# Altium PCB standos.PcbDoc (part 1 of 2)
Units mil, origin at the board's own origin, x right, y up, seen from the top; angles counter-clockwise.
Board outline 11023.62 x 8464.57 mil, 2 copper layers (Top Layer, Bottom Layer); 116 components, 136 nets, 701 pads, 0 vias.
Unrouted connection lines stored in the file: 409.
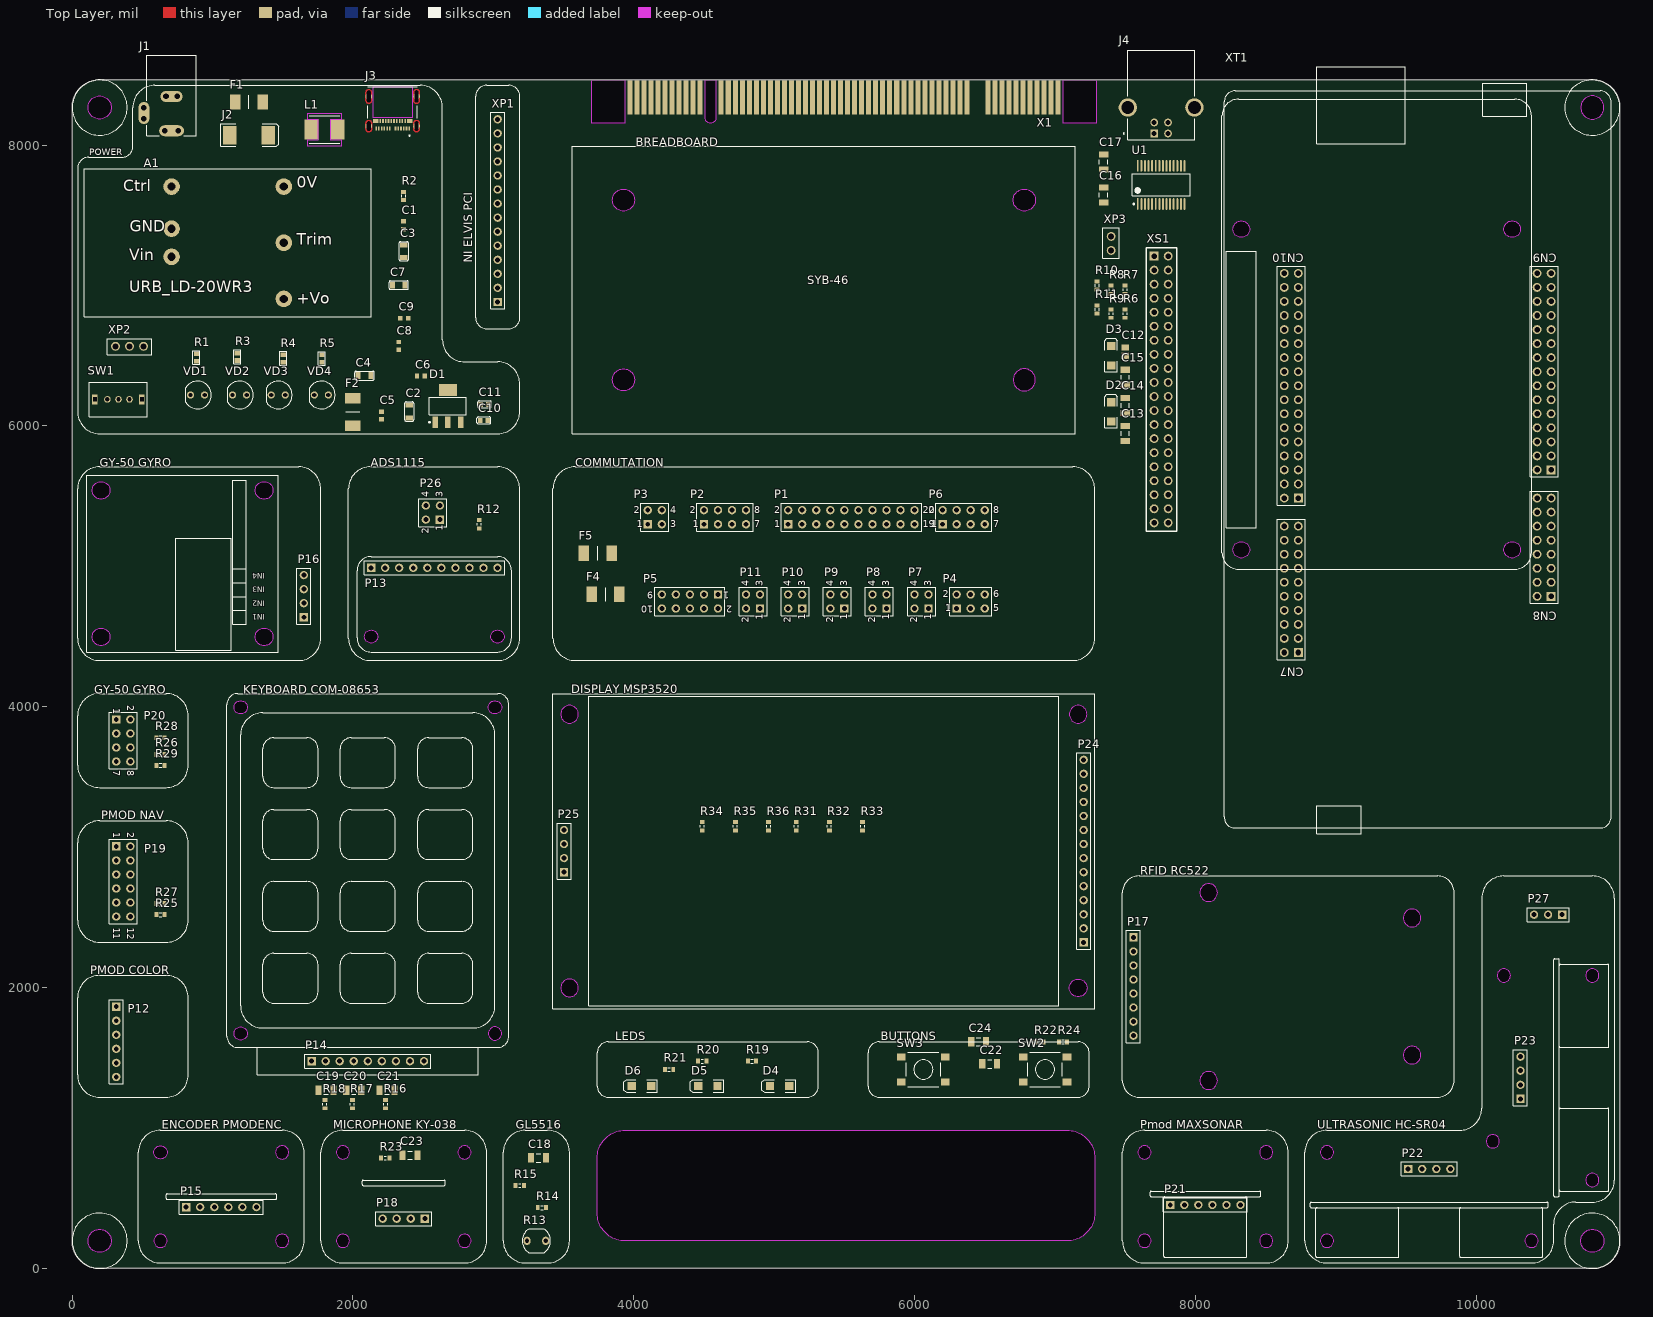
[diagram p0: Top Layer view]
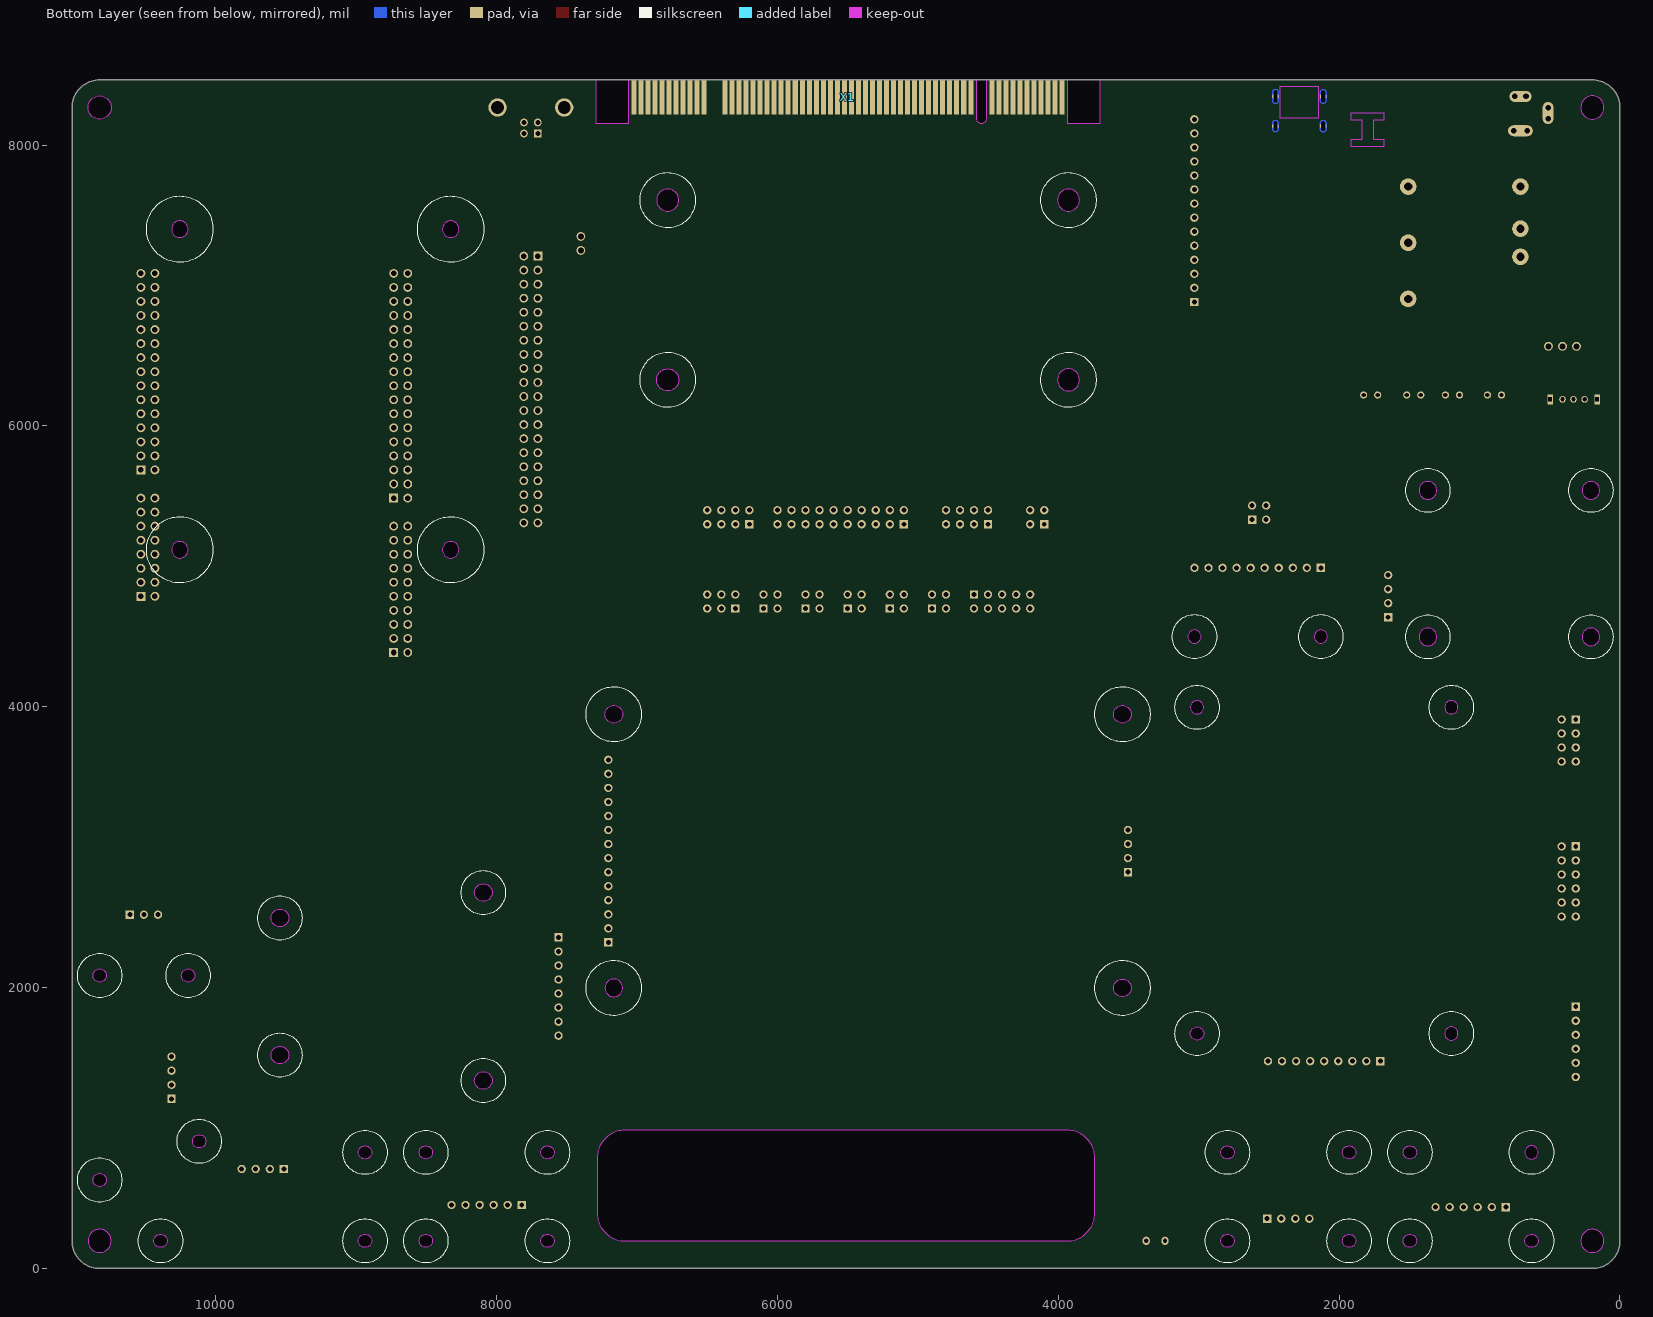
[diagram p1: Bottom Layer view, seen from below]

## Layer stack, top to bottom
Top Solder: solder mask 0.4, Solder Resist, Dk 3.5
Top Layer: signal copper 1.4
Dielectric 1: dielectric 12.6, FR-4, Dk 4.8
Bottom Layer: signal copper 1.4
Bottom Solder: solder mask 0.4, Solder Resist, Dk 3.5

## Board outline
0,196.85 0,8267.72 cw(c196.85,8267.72) 196.85,8464.57 10826.77,8464.57 cw(c10826.77,8267.72) 11023.62,8267.72 11023.62,196.85 cw(c10826.77,196.85) 10826.77,0 196.85,0 cw(c196.85,196.85)
cut-out: 9480.32,1519.69 ccw(c9543.31,1519.69) 9543.31,1456.69 ccw(c9543.31,1519.69) 9606.3,1519.69 ccw(c9543.31,1519.69) 9543.31,1582.68 ccw(c9543.31,1519.69)
cut-out: 9480.32,2496.06 ccw(c9543.31,2496.06) 9543.31,2433.07 ccw(c9543.31,2496.06) 9606.3,2496.06 ccw(c9543.31,2496.06) 9543.31,2559.06 ccw(c9543.31,2496.06)
cut-out: 8031.5,2677.17 ccw(c8094.49,2677.17) 8094.49,2614.17 ccw(c8094.49,2677.17) 8157.48,2677.17 ccw(c8094.49,2677.17) 8094.49,2740.16 ccw(c8094.49,2677.17)
cut-out: 8031.5,1338.58 ccw(c8094.49,1338.58) 8094.49,1275.59 ccw(c8094.49,1338.58) 8157.48,1338.58 ccw(c8094.49,1338.58) 8094.49,1401.57 ccw(c8094.49,1338.58)
cut-out: 6702.76,6328.74 ccw(c6781.5,6328.74) 6781.5,6250 ccw(c6781.5,6328.74) 6860.24,6328.74 ccw(c6781.5,6328.74) 6781.5,6407.48 ccw(c6781.5,6328.74)
cut-out: 6781.5,7529.53 cw(c6781.5,7608.27) 6702.76,7608.27 cw(c6781.5,7608.27) 6781.5,7687.01 cw(c6781.5,7608.27) 6860.24,7608.27 cw(c6781.5,7608.27)
cut-out: 3927.17,7529.53 cw(c3927.17,7608.27) 3848.43,7608.27 cw(c3927.17,7608.27) 3927.17,7687.01 cw(c3927.17,7608.27) 4005.91,7608.27 cw(c3927.17,7608.27)
cut-out: 3927.17,6250 cw(c3927.17,6328.74) 3848.43,6328.74 cw(c3927.17,6328.74) 3927.17,6407.48 cw(c3927.17,6328.74) 4005.91,6328.74 cw(c3927.17,6328.74)
cut-out: 2130,4452.76 cw(c2130,4500) 2082.76,4500 cw(c2130,4500) 2130,4547.24 cw(c2130,4500) 2177.24,4500 cw(c2130,4500)
cut-out: 3030,4452.76 cw(c3030,4500) 2982.76,4500 cw(c3030,4500) 3030,4547.24 cw(c3030,4500) 3077.24,4500 cw(c3030,4500)
cut-out: 3011.81,3948.82 cw(c3011.81,3996.06) 2964.57,3996.06 cw(c3011.81,3996.06) 3011.81,4043.31 cw(c3011.81,3996.06) 3059.06,3996.06 cw(c3011.81,3996.06)
cut-out: 2964.57,1673.23 ccw(c3011.81,1673.23) 3011.81,1625.98 ccw(c3011.81,1673.23) 3059.06,1673.23 ccw(c3011.81,1673.23) 3011.81,1720.47 ccw(c3011.81,1673.23)
cut-out: 1200.79,1625.98 cw(c1200.79,1673.23) 1153.54,1673.23 cw(c1200.79,1673.23) 1200.79,1720.47 cw(c1200.79,1673.23) 1248.03,1673.23 cw(c1200.79,1673.23)
cut-out: 1200.79,3948.82 cw(c1200.79,3996.06) 1153.54,3996.06 cw(c1200.79,3996.06) 1200.79,4043.31 cw(c1200.79,3996.06) 1248.03,3996.06 cw(c1200.79,3996.06)
cut-out: 206.69,4435.04 cw(c206.69,4498.03) 143.7,4498.03 cw(c206.69,4498.03) 206.69,4561.02 cw(c206.69,4498.03) 269.68,4498.03 cw(c206.69,4498.03)
cut-out: 1368.11,4435.04 cw(c1368.11,4498.03) 1305.12,4498.03 cw(c1368.11,4498.03) 1368.11,4561.02 cw(c1368.11,4498.03) 1431.1,4498.03 cw(c1368.11,4498.03)
cut-out: 1368.11,5478.35 cw(c1368.11,5541.34) 1305.12,5541.34 cw(c1368.11,5541.34) 1368.11,5604.33 cw(c1368.11,5541.34) 1431.1,5541.34 cw(c1368.11,5541.34)
cut-out: 206.69,5478.35 cw(c206.69,5541.34) 143.7,5541.34 cw(c206.69,5541.34) 206.69,5604.33 cw(c206.69,5541.34) 269.68,5541.34 cw(c206.69,5541.34)
cut-out: 2748.03,826.77 ccw(c2795.28,826.77) 2795.28,779.53 ccw(c2795.28,826.77) 2842.52,826.77 ccw(c2795.28,826.77) 2795.28,874.02 ccw(c2795.28,826.77)
cut-out: 1881.89,826.77 ccw(c1929.13,826.77) 1929.13,779.53 ccw(c1929.13,826.77) 1976.38,826.77 ccw(c1929.13,826.77) 1929.13,874.02 ccw(c1929.13,826.77)
cut-out: 1448.82,826.77 ccw(c1496.06,826.77) 1496.06,779.53 ccw(c1496.06,826.77) 1543.31,826.77 ccw(c1496.06,826.77) 1496.06,874.02 ccw(c1496.06,826.77)
cut-out: 629.92,779.53 cw(c629.92,826.77) 582.68,826.77 cw(c629.92,826.77) 629.92,874.02 cw(c629.92,826.77) 677.17,826.77 cw(c629.92,826.77)
cut-out: 3606.3,3946.85 ccw(c3543.31,3946.85) 3543.31,4009.84 ccw(c3543.31,3946.85) 3480.32,3946.85 ccw(c3543.31,3946.85) 3543.31,3883.86 ccw(c3543.31,3946.85)
cut-out: 3606.3,1998.03 ccw(c3543.31,1998.03) 3543.31,2061.02 ccw(c3543.31,1998.03) 3480.32,1998.03 ccw(c3543.31,1998.03) 3543.31,1935.04 ccw(c3543.31,1998.03)
cut-out: 7165.35,2061.02 cw(c7165.35,1998.03) 7228.35,1998.03 cw(c7165.35,1998.03) 7165.35,1935.04 cw(c7165.35,1998.03) 7102.36,1998.03 cw(c7165.35,1998.03)
cut-out: 7228.35,3946.85 ccw(c7165.35,3946.85) 7165.35,4009.84 ccw(c7165.35,3946.85) 7102.36,3946.85 ccw(c7165.35,3946.85) 7165.35,3883.86 ccw(c7165.35,3946.85)
cut-out: 10070.87,905.51 ccw(c10118.11,905.51) 10118.11,858.27 ccw(c10118.11,905.51) 10165.35,905.51 ccw(c10118.11,905.51) 10118.11,952.76 ccw(c10118.11,905.51)
cut-out: 10149.61,2086.61 ccw(c10196.85,2086.61) 10196.85,2039.37 ccw(c10196.85,2086.61) 10244.09,2086.61 ccw(c10196.85,2086.61) 10196.85,2133.86 ccw(c10196.85,2086.61)
cut-out: 8889.76,826.77 ccw(c8937.01,826.77) 8937.01,779.53 ccw(c8937.01,826.77) 8984.25,826.77 ccw(c8937.01,826.77) 8937.01,874.02 ccw(c8937.01,826.77)
cut-out: 8456.69,826.77 ccw(c8503.94,826.77) 8503.94,779.53 ccw(c8503.94,826.77) 8551.18,826.77 ccw(c8503.94,826.77) 8503.94,874.02 ccw(c8503.94,826.77)
cut-out: 7590.55,826.77 ccw(c7637.8,826.77) 7637.8,779.53 ccw(c7637.8,826.77) 7685.04,826.77 ccw(c7637.8,826.77) 7637.8,874.02 ccw(c7637.8,826.77)
cut-out: 2748.03,196.85 ccw(c2795.28,196.85) 2795.28,149.61 ccw(c2795.28,196.85) 2842.52,196.85 ccw(c2795.28,196.85) 2795.28,244.09 ccw(c2795.28,196.85)
cut-out: 1881.89,196.85 ccw(c1929.13,196.85) 1929.13,149.61 ccw(c1929.13,196.85) 1976.38,196.85 ccw(c1929.13,196.85) 1929.13,244.09 ccw(c1929.13,196.85)
cut-out: 1448.82,196.85 ccw(c1496.06,196.85) 1496.06,149.61 ccw(c1496.06,196.85) 1543.31,196.85 ccw(c1496.06,196.85) 1496.06,244.09 ccw(c1496.06,196.85)
cut-out: 582.68,196.85 ccw(c629.92,196.85) 629.92,149.61 ccw(c629.92,196.85) 677.17,196.85 ccw(c629.92,196.85) 629.92,244.09 ccw(c629.92,196.85)
cut-out: 10779.53,2086.61 ccw(c10826.77,2086.61) 10826.77,2039.37 ccw(c10826.77,2086.61) 10874.02,2086.61 ccw(c10826.77,2086.61) 10826.77,2133.86 ccw(c10826.77,2086.61)
cut-out: 10779.53,629.92 ccw(c10826.77,629.92) 10826.77,582.68 ccw(c10826.77,629.92) 10874.02,629.92 ccw(c10826.77,629.92) 10826.77,677.17 ccw(c10826.77,629.92)
cut-out: 10346.46,196.85 ccw(c10393.7,196.85) 10393.7,149.61 ccw(c10393.7,196.85) 10440.94,196.85 ccw(c10393.7,196.85) 10393.7,244.09 ccw(c10393.7,196.85)
cut-out: 8889.76,196.85 ccw(c8937.01,196.85) 8937.01,149.61 ccw(c8937.01,196.85) 8984.25,196.85 ccw(c8937.01,196.85) 8937.01,244.09 ccw(c8937.01,196.85)
cut-out: 8456.69,196.85 ccw(c8503.94,196.85) 8503.94,149.61 ccw(c8503.94,196.85) 8551.18,196.85 ccw(c8503.94,196.85) 8503.94,244.09 ccw(c8503.94,196.85)
cut-out: 7590.55,196.85 ccw(c7637.8,196.85) 7637.8,149.61 ccw(c7637.8,196.85) 7685.04,196.85 ccw(c7637.8,196.85) 7637.8,244.09 ccw(c7637.8,196.85)
cut-out: 10255.91,7342.52 cw(c10255.91,7401.57) 10196.85,7401.57 cw(c10255.91,7401.57) 10255.91,7460.63 cw(c10255.91,7401.57) 10314.96,7401.57 cw(c10255.91,7401.57)
cut-out: 8326.77,7342.52 cw(c8326.77,7401.57) 8267.72,7401.57 cw(c8326.77,7401.57) 8326.77,7460.63 cw(c8326.77,7401.57) 8385.83,7401.57 cw(c8326.77,7401.57)
cut-out: 10255.91,5059.06 cw(c10255.91,5118.11) 10196.85,5118.11 cw(c10255.91,5118.11) 10255.91,5177.17 cw(c10255.91,5118.11) 10314.96,5118.11 cw(c10255.91,5118.11)
cut-out: 8326.77,5059.06 cw(c8326.77,5118.11) 8267.72,5118.11 cw(c8326.77,5118.11) 8326.77,5177.17 cw(c8326.77,5118.11) 8385.83,5118.11 cw(c8326.77,5118.11)
cut-out: 4509.33,8192.73 4509.33,8464.57 4584.54,8464.57 4584.54,8192.33 4584.55,8192.73 cw(c4546.95,8192.73)
cut-out: 10744.09,8267.72 ccw(c10826.77,8267.72) 10826.77,8185.04 ccw(c10826.77,8267.72) 10909.45,8267.72 ccw(c10826.77,8267.72) 10826.77,8350.39 ccw(c10826.77,8267.72)
cut-out: 10744.09,196.85 cw(c10826.77,196.85) 10826.77,279.53 cw(c10826.77,196.85) 10909.45,196.85 cw(c10826.77,196.85) 10826.77,114.17 cw(c10826.77,196.85)
cut-out: 196.85,8185.04 cw(c196.85,8267.72) 114.17,8267.72 cw(c196.85,8267.72) 196.85,8350.39 cw(c196.85,8267.72) 279.53,8267.72 cw(c196.85,8267.72)
cut-out: 196.85,114.17 cw(c196.85,196.85) 114.17,196.85 cw(c196.85,196.85) 196.85,279.53 cw(c196.85,196.85) 279.53,196.85 cw(c196.85,196.85)
cut-out: 3740.16,393.7 3740.16,787.4 cw(c3937.01,787.4) 3937.01,984.25 7086.61,984.25 cw(c7086.61,787.4) 7283.46,787.4 7283.46,393.7 cw(c7086.61,393.7) 7086.61,196.85 3937.01,196.85 cw(c3937.01,393.7)
cut-out: 7059.33,8154.72 7059.33,8464.57 7295.57,8464.57 7295.57,8154.72
cut-out: 3700.91,8154.72 3700.91,8464.57 3937.11,8464.57 3937.11,8154.72

## Design rules (kind name [scope] priority, off if disabled: settings)
Clearance [All] p1: gap=10 ignorepadtopadclearanceinfootprint=FALSE except(0: Arc-Hole Track-Hole SMDPad-Hole THPad-Hole Via-Hole Fill-Hole Poly-Hole Region-Hole Text-Hole)
DiffPairsRouting [All] p1: maxlimit=10 minlimit=10 mostfreqgap=10 toplayer_minwidth=15 toplayer_maxwidth=15 toplayer_prefwidth=15 bottomlayer_minwidth=15 bottomlayer_maxwidth=15 bottomlayer_prefwidth=15 maxuncoupledlength=500
PolygonConnect [All] p1: connectstyle=Relief reliefconductorwidth=10 reliefentries=4 polygonreliefangle="90 Angle" airgapwidth=10
RoutingVias [All] p1: holewidth=28 width=50 viastyle="Through Hole" minholewidth=28 minwidth=50 maxholewidth=28 maxwidth=50
SolderMaskExpansion [All] p1: expansion=4 istentingtop=FALSE
Width [All] p1: maxlimit=39.37 minlimit=7.87 preferedwidth=11.81
29 further rules are at their usual default settings.

## Classes and differential pairs
component class Power: A1 C1 C2 C3 C4 C5 C6 C7 C8 C9 C10 C11 D1 F1 F2 J1 J2 J3 L1 R1 R2 R3 R4 R5 SW1 VD1 VD2 VD3 VD4 X2 XP2
component class Rangefinders: P21 P22 P23 P27
component class "Inertial systems": P19 P20 R25 R26 R27 R28 R29
component class Display: P24 P25 R31 R32 R33 R34 R35 R36
component class "STM32 Nucleo-144": XT1
component class Commutation: P1 P2 P3 P4 P5 P6 P7 P8 P9 P10 P11 R6 R7
component class Peripherals: C18 C19 C20 C21 C22 C23 C24 D4 D5 D6 F4 F5 P12 P13 P14 P15 P16 P17 P18 P26 R12 R13 R14 R15 R16 R17 R18 R19 R20 R21 R22 R23 R24 SW2 SW3
net class ADC_A[2..3]: ADC_A2 ADC_A3
component class USB: C12 C13 C14 C15 C16 C17 D2 D3 J4 R8 R9 R10 R11 U1 XP3
component class "Raspberry Pi4": XS1
component class Elvis_PCI: X1 XP1
differential pair USB_D: +USB_D_P -USB_D_N
differential pair FT_D: +FT_D_P -FT_D_N

## Components (designator, comment, footprint, x,y, rotation, side; value= is the part's Value field where it differs from the comment)
A1 "URB2405LD-20WR3" URB_LD-20WR3 1108.66,7304.72 r0 top
C1 "Cap Semi" 1608[0603] 2362.2,7429.13 r90 top value=1nF
C2 "Cap Pol3" C0805#1 2401.57,6102.36 r270 top value=330uF
C3 "Cap Pol3" C0805#1 2362.2,7244.09 r270 top value=330uF
C4 "Cap Pol3" C0805#1 2082.68,6358.27 r0 top value=470uF
C5 "Cap Semi" 1608[0603] 2204.72,6074.8 r270 top value=1uF
C6 "Cap Semi" 1608[0603] 2484.25,6354.33 r0 top value=1nF
C7 "Cap Pol3" C0805#1 2326.77,7003.31 r180 top value=4.7uF
C8 "Cap Semi" 1608[0603] 2326.77,6570.24 r90 top value=10nF
C9 "Cap Semi" 1608[0603] 2366.14,6767.09 r180 top value=100nF
C10 "C" C0603 2933.07,6039.37 r180 top value="0,1 мк"
C11 "C" C0603 2937.99,6153.54 r180 top value="10 мк"
C12 "Cap Pol3" C0805#2 7500,6529.53 r90 top value=4.7uF
C13 "Cap Semi" C1206 7500,5946.85 r90 top value=10nF
C14 "Cap Semi" C1206 7500,6146.85 r90 top value=100nF
C15 "Cap Semi" C1206 7500,6346.85 r90 top value=100nF
C16 "Cap Semi" C1206 7346.46,7644.1 r90 top value=47pF
C17 "Cap Semi" C1206 7346.46,7880.32 r90 top value=47pF
C18 "Cap Semi" C1206 3320.87,787.4 r0 top value=1uF
C19 "Cap Semi" C1206 1809.45,1270.47 r0 top value=1uF
C20 "Cap Semi" C1206 2006.3,1270.47 r0 top value=1uF
C21 "Cap Semi" C1206 2242.52,1270.47 r0 top value=1uF
C22 "Cap Semi" C1206 6535.43,1456.69 r0 top value=1uF
C23 "Cap Semi" C1206 2407.87,806.3 r180 top value=47nF
C24 "Cap Semi" C1206 6456.69,1614.17 r0 top value=1uF
D1 "LD1117" SOT-223 2677.17,6141.73 r90 top
D2 "LED2" 3.2X1.6X1.1 7400,6100 r90 top
D3 "LED2" 3.2X1.6X1.1 7400,6500 r90 top
D4 "LED2" 3.2X1.6X1.1 5039.37,1299.21 r180 top
D5 "LED2" 3.2X1.6X1.1 4527.56,1299.21 r180 top
D6 "LED2" 3.2X1.6X1.1 4055.12,1299.21 r180 top
F1 "5A" FUSC6127X269N 1259.84,8307.09 r0 top
F2 "3.5A" FUSC6127X269N 2000,6100 r270 top
F4 "5V 1A" FUSC6127X269N 3800,4800 r180 top
F5 "5V 1A" FUSC6127X269N 3744.09,5093.7 r180 top
J1 "PWR2.5" KLD-0202 708.66,8641.73 r270 top
J2 "SK56" SMC 1259.84,8070.87 r0 top
J3 "105450-0101" MOLEX_105450-0101 2283.46,8267.72 r180 top
J4 "USB-B-S-X-X-TH" SAMTEC_USB-B-S-X-X-TH 7755.91,8267.72 r180 top
L1 "ETQP4M4R7YFP" L 1627.52,7923.66 r0 top
P1 "Header 10X2" HDR2X10 5100,5300 r0 top
P2 "Header 4X2" HDR2X4 4500,5300 r0 top
P3 "Header 2X2" HDR2X2 4100,5300 r0 top
P4 "Header 3X2" HDR2X3 6300,4700 r0 top
P5 "Header 5X2" HDR2X5 4600,4800 r180 top
P6 "Header 4X2" HDR2X4 6200,5300 r0 top
P7 "Header 2X2" HDR2X2 6100,4700 r90 top
P8 "Header 2X2" HDR2X2 5800,4700 r90 top
P9 "Header 2X2" HDR2X2 5500,4700 r90 top
P10 "Header 2X2" HDR2X2 5200,4700 r90 top
P11 "Header 2X2" HDR2X2 4900,4700 r90 top
P12 "Header 6" HDR1X6 314.96,1864.17 r270 top locked
P13 "Header 10" HDR1X10 2130,4990 r0 top locked
P14 "Header 9" HDR1X9 1706.3,1476.38 r0 top locked
P15 "Header 6" HDR1X6 812.99,437.01 r0 top
P16 "Header 4" HDR1X4 1650.59,4637.8 r90 top locked
P17 "Header 8" HDR1X8 7559.06,2357.87 r270 top locked
P18 "Header 4" HDR1X4 2512.2,354.33 r180 top locked
P19 "Header 6X2" HDR2X6 314.96,3005.91 r270 top locked
P20 "Header 4X2" HDR2X4 314.96,3909.84 r270 top locked
P21 "Header 6" HDR1X6 7820.87,452.76 r0 top locked
P22 "Header 4" HDR1X4 9515.35,708.66 r0 top locked
P23 "Header 4" HDR1X4 10314.96,1208.27 r90 top locked
P24 "Header 14" HDR1X14 7204.72,2322.44 r90 top locked
P25 "Header 4" HDR1X4 3503.94,2822.44 r90 top locked
P26 "Header 2X2" HDR2X2 2619.68,5333.07 r90 top
P27 "Header 3" HDR1X3 10611.81,2519.68 r180 top
R1 "R" R0603 885.83,6487.2 r90 top value=330
R2 "Res3" J1-0603 2362.2,7637.8 r270 top value=5K1
R3 "R" R0603 1177.17,6492.13 r90 top value=330
R4 "R" R0603 1503.94,6481.3 r270 top value=330
R5 "R" R0603 1779.53,6480.31 r90 top value=330
R6 "Res3" J1-0603 7500,6800 r90 top value=4K7
R7 "Res3" J1-0603 7500,6970.47 r90 top value=4K7
R8 "Res3" J1-0603 7400,6970.47 r90 top value=10
R9 "Res3" J1-0603 7400,6800 r90 top value=10
R10 "Res3" J1-0603 7300,7000 r90 top value=330
R11 "Res3" J1-0603 7300,6829.53 r90 top value=330
R12 "Res3" J1-0603 2900,5300 r90 top value=10K
R13 "GL5516" GL5516 3307.09,196.85 r0 top
R14 "Res3" J1-0603 3346.46,433.07 r0 top value=10K
R15 "Res3" J1-0603 3188.98,590.55 r0 top value=1K
R16 "Res3" J1-0603 2233.07,1170.47 r90 top value=1K
R17 "Res3" J1-0603 1996.85,1170.47 r90 top value=1K
R18 "Res3" J1-0603 1800,1170.47 r90 top value=1K
R19 "Res3" J1-0603 4842.53,1476.38 r0 top value=330
R20 "Res3" J1-0603 4488.2,1476.38 r0 top value=330
R21 "Res3" J1-0603 4251.97,1417.32 r0 top value=330
R22 "Res3" J1-0603 6889.76,1614.17 r0 top value=10K
R23 "Res3" J1-0603 2230.71,786.61 r180 top value=100
R24 "Res3" J1-0603 7057.09,1614.17 r0 top value=10K
R25 "Res3" J1-0603 629.92,2519.68 r0 top value=10K
R26 "Res3" J1-0603 629.92,3661.42 r0 top value=10K
R27 "Res3" J1-0603 629.92,2598.43 r0 top value=10K
R28 "Res3" J1-0603 629.92,3779.53 r180 top value=100K
R29 "Res3" J1-0603 629.92,3582.68 r180 top value=100K
R31 "Res3" J1-0603 5157.48,3149.61 r90 top value=10K
R32 "Res3" J1-0603 5393.7,3149.61 r90 top value=10K
R33 "Res3" J1-0603 5629.92,3149.61 r90 top value=10K
R34 "Res3" J1-0603 4488.19,3149.61 r90 top value=100K
R35 "Res3" J1-0603 4724.41,3149.61 r90 top value=100K
R36 "Res3" J1-0603 4960.63,3149.61 r90 top value=100K
SW1 "KLS7-SS03-12D02-EG-3.0" switch 330.71,6188.98 r180 top
SW2 "430152043826" 430152043826 6929.13,1417.32 r180 top
SW3 "430152043826" 430152043826 6062.99,1417.32 r180 top
U1 "FT232RL-Reel" SSOP-28_N 7755.91,7716.54 r90 top
VD1 "RED" GNL-3012HD 893.7,6220.47 r0 top
VD2 "YELLOW" GNL-3012HD 1192.91,6220.47 r0 top
VD3 "GREEN" GNL-3012HD 1468.5,6220.47 r0 top
VD4 "BLUE" GNL-3012HD 1775.59,6220.47 r0 top
X1 "PCI" PCI 7023.23,8342.13 r0 bottom
XP1 "Header 14" HDR1X14 3031.5,6883.46 r90 top
XP2 "Замыкатель PLS-3" PLS-3 409.45,6566.93 r90 top
XP3 "Замыкатель MJ-O-8KLS" PLS-2 7400,7300 r0 top
XS1 "RPi-J8" RaPi_PLD-40 7755.91,6259.84 r0 top
XT1 "STM32-NUCLEO-144-ZIO" STM32-NUCLEO-144-ZIO 10833.07,4386.61 r180 top

## Footprints (in the part's own frame and the unit in brackets; to place one, negate y for a bottom-side part, rotate by r counter-clockwise, add the part's x,y. Pads: shape width x height; smd on the part's side, far side on the other; paste and mask are expansions set on the pad)
3.2X1.6X1.1 [mm] "SMT LED; 2 Flat Leads"
  rect 1.5x1.5 smd: 1(-1.75,0) 2(1.75,0)
  silkscreen extent -2.9,-1.15 3.2,1.15
1608[0603] [mm] "Chip Capacitor, Body 1.6x0.8mm, IPC High Density"
  rect 0.8x0.9 smd: 1(-0.7,0) 2(0.7,0)
  body extent -0.87,-0.48 0.87,0.48, height 1.3
430152043826 [mm] "6*6mm vertical type, SMD, height 4.3mm, white actuator, 260gf, T&R"
  rect 1.55x1.3 smd: 1(-3.975,2.25) 2(-3.975,-2.25) 3(3.975,2.25) 4(3.975,-2.25)
  silkscreen extent -3.1,-3.1 3.1,3.1, body extent -4.5,-3.1 4.5,3.1, height 4.3
C0603 [mm]
  rect 0.85x0.95 smd: 1(-0.675,0) 2(0.675,0)
  silkscreen extent -1.25,-0.63 1.25,0.63, body extent -0.8,-0.4 0.8,0.4, height 0.9
C0805#1 [mm] "Chip Capacitor, 2-Leads, Body 2,00x1,25mm, IPC Medium Density"
  rect 0.9x1.3 smd: 1(-1.15,0) 2(1.15,0)
  silkscreen extent -1.75,-0.8 1.75,0.8, body extent -1,-0.63 1,0.64, height 1.32
C0805#2 [mm] "Chip Capacitor, Body 2.0x1.3mm, IPC High Density"
  rect 1.1x1.4 smd: 1(-0.75,0) 2(0.75,0)
  body extent -1.1,-0.72 1.1,0.72, height 1.4
C1206 [mm] "Chip Capacitor, Body 3.2x1.6mm, IPC High Density"
  rect 1.1x1.7 smd: 1(-1.35,0) 2(1.35,0)
  silkscreen extent -0.4,-0.75 0.4,0.75, body extent -1.7,-0.9 1.7,0.9, height 1.3
FUSC6127X269N [mm]
  rect 1.91x2.8 smd: 1(-2.5,0) 2(2.5,0)
  silkscreen extent 0,-1.24 0,1.24, body extent -3.05,-1.35 3.05,1.35, height 2.69
GL5516 [mm]
  oval 1.3x1.5 hole 0.8 mask+0.05: 1(1.7,0) 2(-1.7,0)
  silkscreen extent -2.55,-2.15 2.55,2.15, body extent -2.55,-2.15 2.55,2.15, height 2.7
GNL-3012HD [mm]
  round 1.3 hole 0.8 mask+0.05: 1(1.27,0) 2(-1.27,0)
  silkscreen extent -2.11,-2.5 2.5,2.5, body extent -1.53,-1.9 1.9,1.9, height 5.44
HDR1X3 [mm] "Connector; Header; 3 Position"
  rect 1.5x1.5 hole 0.9: 1(0,0)
  round 1.5 hole 0.9: 2(2.54,0) 3(5.08,0)
  silkscreen extent -1.27,-1.27 6.35,1.27
HDR1X4 [mm] "Connector; Header; 4 Position"
  rect 1.5x1.5 hole 0.9: 1(0,0)
  round 1.5 hole 0.9: 2(2.54,0) 3(5.08,0) 4(7.62,0)
  silkscreen extent -1.27,-1.27 8.89,1.27
HDR1X6 [mm] "Connector; Header; 6 Position"
  rect 1.5x1.5 hole 0.9: 1(0,0)
  round 1.5 hole 0.9: 2(2.54,0) 3(5.08,0) 4(7.62,0) 5(10.16,0) 6(12.7,0)
  silkscreen extent -1.27,-1.27 13.97,1.27
HDR1X8 [mm] "Connector; Header; 8 Position"
  rect 1.5x1.5 hole 0.9: 1(0,0)
  round 1.5 hole 0.9: 2(2.54,0) 3(5.08,0) 4(7.62,0) 5(10.16,0) 6(12.7,0) 7(15.24,0) 8(17.78,0)
  silkscreen extent -1.27,-1.27 19.05,1.27
HDR1X9 [mm] "Connector; Header; 9 Position"
  rect 1.5x1.5 hole 0.9: 1(0,0)
  round 1.5 hole 0.9: 2(2.54,0) 3(5.08,0) 4(7.62,0) 5(10.16,0) 6(12.7,0) 7(15.24,0) 8(17.78,0) 9(20.32,0)
  silkscreen extent -1.27,-1.27 21.59,1.27
HDR1X10 [mm] "Connector; Header; 10 Position"
  rect 1.5x1.5 hole 0.9: 1(0,0)
  round 1.5 hole 0.9: 2(2.54,0) 3(5.08,0) 4(7.62,0) 5(10.16,0) 6(12.7,0) 7(15.24,0) 8(17.78,0) 9(20.32,0) 10(22.86,0)
  silkscreen extent -1.27,-1.27 24.13,1.27
HDR1X14 [mm] "Connector; Header; 14 Position"
  rect 1.5x1.5 hole 0.9: 1(0,0)
  round 1.5 hole 0.9: 2(2.54,0) 3(5.08,0) 4(7.62,0) 5(10.16,0) 6(12.7,0) 7(15.24,0) 8(17.78,0) 9(20.32,0) 10(22.86,0) 11(25.4,0) 12(27.94,0) 13(30.48,0) 14(33.02,0)
  silkscreen extent -1.27,-1.27 34.29,1.27
HDR2X2 [mm] "Connector; Header; 2x2 Position"
  rect 1.5x1.5 hole 0.9: 1(0,0)
  round 1.5 hole 0.9: 2(0,2.54) 3(2.54,0) 4(2.54,2.54)
  silkscreen extent -1.27,-1.27 3.81,3.81
HDR2X3 [mm] "Connector; Header; 3x2 Position"
  rect 1.5x1.5 hole 0.9: 1(0,0)
  round 1.5 hole 0.9: 2(0,2.54) 3(2.54,0) 4(2.54,2.54) 5(5.08,0) 6(5.08,2.54)
  silkscreen extent -1.27,-1.27 6.35,3.81
HDR2X4 [mm] "Connector; Header; 4x2 Position"
  rect 1.5x1.5 hole 0.9: 1(0,0)
  round 1.5 hole 0.9: 2(0,2.54) 3(2.54,0) 4(2.54,2.54) 5(5.08,0) 6(5.08,2.54) 7(7.62,0) 8(7.62,2.54)
  silkscreen extent -1.27,-1.27 8.89,3.81
HDR2X5 [mm] "Connector; Header; 5x2 Position"
  rect 1.5x1.5 hole 0.9: 1(0,0)
  round 1.5 hole 0.9: 2(0,2.54) 3(2.54,0) 4(2.54,2.54) 5(5.08,0) 6(5.08,2.54) 7(7.62,0) 8(7.62,2.54) 9(10.16,0) 10(10.16,2.54)
  silkscreen extent -1.27,-1.27 11.43,3.81
HDR2X6 [mm] "Connector; Header; 6x2 Position"
  rect 1.5x1.5 hole 0.9: 1(0,0)
  round 1.5 hole 0.9: 2(0,2.54) 3(2.54,0) 4(2.54,2.54) 5(5.08,0) 6(5.08,2.54) 7(7.62,0) 8(7.62,2.54) 9(10.16,0) 10(10.16,2.54) 11(12.7,0) 12(12.7,2.54)
  silkscreen extent -1.27,-1.27 13.97,3.81
HDR2X10 [mm] "Connector; Header; 10x2 Position"
  rect 1.5x1.5 hole 0.9: 1(0,0)
  round 1.5 hole 0.9: 2(0,2.54) 3(2.54,0) 4(2.54,2.54) 5(5.08,0) 6(5.08,2.54) 7(7.62,0) 8(7.62,2.54) 9(10.16,0) 10(10.16,2.54) 11(12.7,0) 12(12.7,2.54) 13(15.24,0) 14(15.24,2.54) 15(17.78,0) 16(17.78,2.54) 17(20.32,0) 18(20.32,2.54) 19(22.86,0) 20(22.86,2.54)
  silkscreen extent -1.27,-1.27 24.13,3.81
J1-0603 [mm] "Chip Resistor, Body 1.6x0.8mm, IPC High Density"
  rect 0.7x0.9 smd: 1(-0.75,0) 2(0.75,0)
  silkscreen extent -0.2,-0.35 0.2,0.35, body extent -0.85,-0.48 0.85,0.48, height 0.9
KLD-0202 [mm] "DC Power Jack, 2.5mm, KLD Series, PCB Mount"
  oval 2x4.5 all layers, no hole: 1(13.7,0)
  round 1.5 hole 1: 1A(13.7,-1.25) 1B(13.7,1.25) 2A(7.5,-1) 2B(7.5,1) 3A(9.5,-5) 3B(11.5,-5)
  oval 2x4 all layers, no hole: 2(7.5,0)
  oval 4x2 all layers, no hole: 3(10.5,-5)
  silkscreen extent 0,-4.5 14.6,4.5
L [mm]
  rect 2.5x3.6 smd: 1(1.961,4.739) 2(6.661,4.739)
  Keep-Out Layer region: 7.361,6.539 5.411,6.539 5.411,2.939 7.361,2.939 7.361,1.739 1.261,1.739 1.261,2.939 3.211,2.939 3.211,6.539 1.261,6.539 1.261,7.739 7.361,7.739
  Keep-Out Layer region: 7.361,6.539 5.411,6.539 5.411,2.939 7.361,2.939 7.361,1.739 1.261,1.739 1.261,2.939 3.211,2.939 3.211,6.539 1.261,6.539 1.261,7.739 7.361,7.739
  silkscreen extent 1.56,2.24 7.06,7.24
MOLEX_105450-0101 [mm]
  rect 0.3x0.7 smd: A1(-3,3.77) A2(-2.5,3.77) A3(-2,3.77) A4(-1.5,3.77) A5(-1,3.77) A6(-0.5,3.77) A7(0.5,3.77) A8(1,3.77) A9(1.5,3.77) A10(2,3.77) A11(2.5,3.77) A12(3,3.77) B2(2.25,2.47) B3(1.75,2.47) B4(1.25,2.47) B5(0.75,2.47) B6(0.25,2.47) B7(-0.25,2.47) B8(-0.75,2.47) B9(-1.25,2.47) B10(-1.75,2.47) B11(-2.25,2.47)
  rect 1x0.7 smd: B1(3.1,2.47) B12(-3.1,2.47)
  round 1.2 hole 0.65 slot 1.7 at 90 deg mask+0: S1(-4.32,3.36)
  round 1.2 hole 0.65 slot 1.725 at 90 deg mask+0: S2(4.32,3.36)
  round 1.2 hole 0.65 slot 2.175 at 90 deg mask+0: S3(-4.32,-2) S4(4.32,-2)
  Top Layer region: 4.35,-0.702 4.382,-0.706 4.414,-0.711 4.446,-0.718 4.478,-0.727 4.509,-0.737 4.539,-0.749 4.569,-0.763 4.598,-0.778 4.626,-0.795 4.654,-0.813 4.68,-0.832 4.705,-0.853 4.73,-0.875 4.752,-0.898 4.774,-0.923 4.795,-0.949 4.814,-0.975 4.831,-1.003 4.847,-1.031 4.862,-1.061 4.875,-1.091 4.886,-1.121 4.896,-1.153 4.904,-1.184 4.911,-1.216 4.916,-1.249 4.919,-1.281 4.92,-1.314 4.92,-1.35 4.92,-2.65 4.92,-2.686 4.919,-2.719 4.916,-2.751 4.911,-2.784 4.904,-2.816 4.896,-2.847 4.886,-2.879 4.875,-2.909 4.862,-2.939 4.847,-2.969 4.831,-2.997 4.814,-3.025 4.795,-3.051 4.774,-3.077 4.752,-3.102 4.73,-3.125 4.705,-3.147 4.68,-3.168 4.654,-3.187 4.626,-3.205 4.598,-3.222 4.569,-3.237 4.539,-3.251 4.509,-3.263 4.478,-3.273 4.446,-3.282 4.414,-3.289 4.382,-3.294 4.35,-3.298 4.32,-3.3 4.29,-3.298 4.258,-3.294 4.226,-3.289 4.194,-3.282 4.162,-3.273 4.131,-3.263 4.101,-3.251 4.071,-3.237 4.042,-3.222 4.014,-3.205 3.986,-3.187 3.96,-3.168 3.935,-3.147 3.91,-3.125 3.888,-3.102 3.866,-3.077 3.845,-3.051 3.826,-3.025 3.809,-2.997 3.793,-2.969 3.778,-2.939 3.765,-2.909 3.754,-2.879 3.744,-2.847 3.736,-2.816 3.729,-2.784 3.724,-2.751 3.721,-2.719 3.72,-2.686 3.72,-2.65 3.72,-1.35 3.72,-1.314 3.721,-1.281 3.724,-1.249 3.729,-1.216 3.736,-1.184 3.744,-1.153 3.754,-1.121 3.765,-1.091 3.778,-1.061 3.793,-1.031 3.809,-1.003 3.826,-0.975 3.845,-0.949 3.866,-0.923 3.888,-0.898 3.91,-0.875 3.935,-0.853 3.96,-0.832 3.986,-0.813 4.014,-0.795 4.042,-0.778 4.071,-0.763 4.101,-0.749 4.131,-0.737 4.162,-0.727 4.194,-0.718 4.226,-0.711 4.258,-0.706 4.29,-0.702 4.32,-0.7
  Top Layer region: -4.29,-0.652 -4.258,-0.656 -4.226,-0.661 -4.194,-0.668 -4.162,-0.677 -4.131,-0.687 -4.101,-0.699 -4.071,-0.713 -4.042,-0.728 -4.014,-0.745 -3.986,-0.763 -3.96,-0.782 -3.935,-0.803 -3.91,-0.825 -3.888,-0.848 -3.866,-0.873 -3.845,-0.899 -3.826,-0.925 -3.809,-0.953 -3.793,-0.981 -3.778,-1.011 -3.765,-1.041 -3.754,-1.071 -3.744,-1.103 -3.736,-1.134 -3.729,-1.166 -3.724,-1.199 -3.721,-1.231 -3.72,-1.264 -3.72,-1.3 -3.72,-2.7 -3.72,-2.736 -3.721,-2.769 -3.724,-2.801 -3.729,-2.834 -3.736,-2.866 -3.744,-2.897 -3.754,-2.929 -3.765,-2.959 -3.778,-2.989 -3.793,-3.019 -3.809,-3.047 -3.826,-3.075 -3.845,-3.101 -3.866,-3.127 -3.888,-3.152 -3.91,-3.175 -3.935,-3.197 -3.96,-3.218 -3.986,-3.237 -4.014,-3.255 -4.042,-3.272 -4.071,-3.287 -4.101,-3.301 -4.131,-3.313 -4.162,-3.323 -4.194,-3.332 -4.226,-3.339 -4.258,-3.344 -4.29,-3.348 -4.32,-3.35 -4.35,-3.348 -4.382,-3.344 -4.414,-3.339 -4.446,-3.332 -4.478,-3.323 -4.509,-3.313 -4.539,-3.301 -4.569,-3.287 -4.598,-3.272 -4.626,-3.255 -4.654,-3.237 -4.68,-3.218 -4.705,-3.197 -4.73,-3.175 -4.752,-3.152 -4.774,-3.127 -4.795,-3.101 -4.814,-3.075 -4.831,-3.047 -4.847,-3.019 -4.862,-2.989 -4.875,-2.959 -4.886,-2.929 -4.896,-2.897 -4.904,-2.866 -4.911,-2.834 -4.916,-2.801 -4.919,-2.769 -4.92,-2.736 -4.92,-2.7 -4.92,-1.3 -4.92,-1.264 -4.919,-1.231 -4.916,-1.199 -4.911,-1.166 -4.904,-1.134 -4.896,-1.103 -4.886,-1.071 -4.875,-1.041 -4.862,-1.011 -4.847,-0.981 -4.831,-0.953 -4.814,-0.925 -4.795,-0.899 -4.774,-0.873 -4.752,-0.848 -4.73,-0.825 -4.705,-0.803 -4.68,-0.782 -4.654,-0.763 -4.626,-0.745 -4.598,-0.728 -4.569,-0.713 -4.539,-0.699 -4.509,-0.687 -4.478,-0.677 -4.446,-0.668 -4.414,-0.661 -4.382,-0.656 -4.35,-0.652 -4.32,-0.65
  Top Layer region: 4.351,4.459 4.383,4.457 4.414,4.453 4.445,4.447 4.475,4.44 4.505,4.431 4.535,4.42 4.564,4.408 4.592,4.395 4.62,4.38 4.647,4.363 4.673,4.345 4.698,4.326 4.721,4.306 4.744,4.284 4.766,4.261 4.786,4.238 4.805,4.213 4.823,4.187 4.84,4.16 4.855,4.132 4.868,4.104 4.88,4.075 4.891,4.045 4.9,4.015 4.907,3.985 4.913,3.954 4.917,3.923 4.919,3.891 4.92,3.86 4.92,2.86 4.919,2.829 4.917,2.797 4.913,2.766 4.907,2.735 4.9,2.705 4.891,2.675 4.88,2.645 4.868,2.616 4.855,2.588 4.84,2.56 4.823,2.533 4.805,2.507 4.786,2.482 4.766,2.459 4.744,2.436 4.721,2.414 4.698,2.394 4.673,2.375 4.647,2.357 4.62,2.34 4.592,2.325 4.564,2.312 4.535,2.3 4.505,2.289 4.475,2.28 4.445,2.273 4.414,2.267 4.383,2.263 4.351,2.261 4.32,2.26 4.289,2.261 4.257,2.263 4.226,2.267 4.195,2.273 4.165,2.28 4.135,2.289 4.105,2.3 4.076,2.312 4.048,2.325 4.02,2.34 3.993,2.357 3.967,2.375 3.942,2.394 3.919,2.414 3.896,2.436 3.874,2.459 3.854,2.482 3.835,2.507 3.817,2.533 3.8,2.56 3.785,2.588 3.772,2.616 3.76,2.645 3.749,2.675 3.74,2.705 3.733,2.735 3.727,2.766 3.723,2.797 3.721,2.829 3.72,2.86 3.72,3.86 3.721,3.891 3.723,3.923 3.727,3.954 3.733,3.985 3.74,4.015 3.749,4.045 3.76,4.075 3.772,4.104 3.785,4.132 3.8,4.16 3.817,4.187 3.835,4.213 3.854,4.238 3.874,4.261 3.896,4.284 3.919,4.306 3.942,4.326 3.967,4.345 3.993,4.363 4.02,4.38 4.048,4.395 4.076,4.408 4.105,4.42 4.135,4.431 4.165,4.44 4.195,4.447 4.226,4.453 4.257,4.457 4.289,4.459 4.32,4.46
  Top Layer region: -4.289,4.459 -4.257,4.457 -4.226,4.453 -4.195,4.447 -4.165,4.44 -4.135,4.431 -4.105,4.42 -4.076,4.408 -4.048,4.395 -4.02,4.38 -3.993,4.363 -3.967,4.345 -3.942,4.326 -3.919,4.306 -3.896,4.284 -3.874,4.261 -3.854,4.238 -3.835,4.213 -3.817,4.187 -3.8,4.16 -3.785,4.132 -3.772,4.104 -3.76,4.075 -3.749,4.045 -3.74,4.015 -3.733,3.985 -3.727,3.954 -3.723,3.923 -3.721,3.891 -3.72,3.86 -3.72,2.86 -3.721,2.829 -3.723,2.797 -3.727,2.766 -3.733,2.735 -3.74,2.705 -3.749,2.675 -3.76,2.645 -3.772,2.616 -3.785,2.588 -3.8,2.56 -3.817,2.533 -3.835,2.507 -3.854,2.482 -3.874,2.459 -3.896,2.436 -3.919,2.414 -3.942,2.394 -3.967,2.375 -3.993,2.357 -4.02,2.34 -4.048,2.325 -4.076,2.312 -4.105,2.3 -4.135,2.289 -4.165,2.28 -4.195,2.273 -4.226,2.267 -4.257,2.263 -4.289,2.261 -4.32,2.26 -4.355,2.26 -4.385,2.261 -4.415,2.264 -4.445,2.268 -4.474,2.274 -4.504,2.282 -4.532,2.291 -4.561,2.301 -4.588,2.313 -4.615,2.327 -4.641,2.342 -4.667,2.358 -4.691,2.375 -4.715,2.394 -4.738,2.414 -4.759,2.435 -4.779,2.457 -4.799,2.481 -4.816,2.505 -4.833,2.53 -4.848,2.556 -4.862,2.583 -4.875,2.61 -4.886,2.638 -4.895,2.667 -4.903,2.696 -4.91,2.725 -4.915,2.755 -4.918,2.785 -4.92,2.81 -4.92,3.81 -4.92,3.846 -4.919,3.879 -4.916,3.911 -4.911,3.944 -4.904,3.976 -4.896,4.007 -4.886,4.039 -4.875,4.069 -4.862,4.099 -4.847,4.129 -4.831,4.157 -4.814,4.185 -4.795,4.211 -4.774,4.237 -4.752,4.262 -4.73,4.285 -4.705,4.307 -4.68,4.328 -4.654,4.347 -4.626,4.365 -4.598,4.382 -4.569,4.397 -4.539,4.411 -4.509,4.423 -4.478,4.433 -4.446,4.442 -4.414,4.449 -4.382,4.454 -4.35,4.458 -4.32,4.46
  Bottom Layer region: 4.35,-0.702 4.382,-0.706 4.414,-0.711 4.446,-0.718 4.478,-0.727 4.509,-0.737 4.539,-0.749 4.569,-0.763 4.598,-0.778 4.626,-0.795 4.654,-0.813 4.68,-0.832 4.705,-0.853 4.73,-0.875 4.752,-0.898 4.774,-0.923 4.795,-0.949 4.814,-0.975 4.831,-1.003 4.847,-1.031 4.862,-1.061 4.875,-1.091 4.886,-1.121 4.896,-1.153 4.904,-1.184 4.911,-1.216 4.916,-1.249 4.919,-1.281 4.92,-1.314 4.92,-1.35 4.92,-2.65 4.92,-2.686 4.919,-2.719 4.916,-2.751 4.911,-2.784 4.904,-2.816 4.896,-2.847 4.886,-2.879 4.875,-2.909 4.862,-2.939 4.847,-2.969 4.831,-2.997 4.814,-3.025 4.795,-3.051 4.774,-3.077 4.752,-3.102 4.73,-3.125 4.705,-3.147 4.68,-3.168 4.654,-3.187 4.626,-3.205 4.598,-3.222 4.569,-3.237 4.539,-3.251 4.509,-3.263 4.478,-3.273 4.446,-3.282 4.414,-3.289 4.382,-3.294 4.35,-3.298 4.32,-3.3 4.29,-3.298 4.258,-3.294 4.226,-3.289 4.194,-3.282 4.162,-3.273 4.131,-3.263 4.101,-3.251 4.071,-3.237 4.042,-3.222 4.014,-3.205 3.986,-3.187 3.96,-3.168 3.935,-3.147 3.91,-3.125 3.888,-3.102 3.866,-3.077 3.845,-3.051 3.826,-3.025 3.809,-2.997 3.793,-2.969 3.778,-2.939 3.765,-2.909 3.754,-2.879 3.744,-2.847 3.736,-2.816 3.729,-2.784 3.724,-2.751 3.721,-2.719 3.72,-2.686 3.72,-2.65 3.72,-1.35 3.72,-1.314 3.721,-1.281 3.724,-1.249 3.729,-1.216 3.736,-1.184 3.744,-1.153 3.754,-1.121 3.765,-1.091 3.778,-1.061 3.793,-1.031 3.809,-1.003 3.826,-0.975 3.845,-0.949 3.866,-0.923 3.888,-0.898 3.91,-0.875 3.935,-0.853 3.96,-0.832 3.986,-0.813 4.014,-0.795 4.042,-0.778 4.071,-0.763 4.101,-0.749 4.131,-0.737 4.162,-0.727 4.194,-0.718 4.226,-0.711 4.258,-0.706 4.29,-0.702 4.32,-0.7
  Bottom Layer region: -4.29,-0.652 -4.258,-0.656 -4.226,-0.661 -4.194,-0.668 -4.162,-0.677 -4.131,-0.687 -4.101,-0.699 -4.071,-0.713 -4.042,-0.728 -4.014,-0.745 -3.986,-0.763 -3.96,-0.782 -3.935,-0.803 -3.91,-0.825 -3.888,-0.848 -3.866,-0.873 -3.845,-0.899 -3.826,-0.925 -3.809,-0.953 -3.793,-0.981 -3.778,-1.011 -3.765,-1.041 -3.754,-1.071 -3.744,-1.103 -3.736,-1.134 -3.729,-1.166 -3.724,-1.199 -3.721,-1.231 -3.72,-1.264 -3.72,-1.3 -3.72,-2.7 -3.72,-2.736 -3.721,-2.769 -3.724,-2.801 -3.729,-2.834 -3.736,-2.866 -3.744,-2.897 -3.754,-2.929 -3.765,-2.959 -3.778,-2.989 -3.793,-3.019 -3.809,-3.047 -3.826,-3.075 -3.845,-3.101 -3.866,-3.127 -3.888,-3.152 -3.91,-3.175 -3.935,-3.197 -3.96,-3.218 -3.986,-3.237 -4.014,-3.255 -4.042,-3.272 -4.071,-3.287 -4.101,-3.301 -4.131,-3.313 -4.162,-3.323 -4.194,-3.332 -4.226,-3.339 -4.258,-3.344 -4.29,-3.348 -4.32,-3.35 -4.35,-3.348 -4.382,-3.344 -4.414,-3.339 -4.446,-3.332 -4.478,-3.323 -4.509,-3.313 -4.539,-3.301 -4.569,-3.287 -4.598,-3.272 -4.626,-3.255 -4.654,-3.237 -4.68,-3.218 -4.705,-3.197 -4.73,-3.175 -4.752,-3.152 -4.774,-3.127 -4.795,-3.101 -4.814,-3.075 -4.831,-3.047 -4.847,-3.019 -4.862,-2.989 -4.875,-2.959 -4.886,-2.929 -4.896,-2.897 -4.904,-2.866 -4.911,-2.834 -4.916,-2.801 -4.919,-2.769 -4.92,-2.736 -4.92,-2.7 -4.92,-1.3 -4.92,-1.264 -4.919,-1.231 -4.916,-1.199 -4.911,-1.166 -4.904,-1.134 -4.896,-1.103 -4.886,-1.071 -4.875,-1.041 -4.862,-1.011 -4.847,-0.981 -4.831,-0.953 -4.814,-0.925 -4.795,-0.899 -4.774,-0.873 -4.752,-0.848 -4.73,-0.825 -4.705,-0.803 -4.68,-0.782 -4.654,-0.763 -4.626,-0.745 -4.598,-0.728 -4.569,-0.713 -4.539,-0.699 -4.509,-0.687 -4.478,-0.677 -4.446,-0.668 -4.414,-0.661 -4.382,-0.656 -4.35,-0.652 -4.32,-0.65
  Bottom Layer region: 4.351,4.459 4.383,4.457 4.414,4.453 4.445,4.447 4.475,4.44 4.505,4.431 4.535,4.42 4.564,4.408 4.592,4.395 4.62,4.38 4.647,4.363 4.673,4.345 4.698,4.326 4.721,4.306 4.744,4.284 4.766,4.261 4.786,4.238 4.805,4.213 4.823,4.187 4.84,4.16 4.855,4.132 4.868,4.104 4.88,4.075 4.891,4.045 4.9,4.015 4.907,3.985 4.913,3.954 4.917,3.923 4.919,3.891 4.92,3.86 4.92,2.86 4.919,2.829 4.917,2.797 4.913,2.766 4.907,2.735 4.9,2.705 4.891,2.675 4.88,2.645 4.868,2.616 4.855,2.588 4.84,2.56 4.823,2.533 4.805,2.507 4.786,2.482 4.766,2.459 4.744,2.436 4.721,2.414 4.698,2.394 4.673,2.375 4.647,2.357 4.62,2.34 4.592,2.325 4.564,2.312 4.535,2.3 4.505,2.289 4.475,2.28 4.445,2.273 4.414,2.267 4.383,2.263 4.351,2.261 4.32,2.26 4.289,2.261 4.257,2.263 4.226,2.267 4.195,2.273 4.165,2.28 4.135,2.289 4.105,2.3 4.076,2.312 4.048,2.325 4.02,2.34 3.993,2.357 3.967,2.375 3.942,2.394 3.919,2.414 3.896,2.436 3.874,2.459 3.854,2.482 3.835,2.507 3.817,2.533 3.8,2.56 3.785,2.588 3.772,2.616 3.76,2.645 3.749,2.675 3.74,2.705 3.733,2.735 3.727,2.766 3.723,2.797 3.721,2.829 3.72,2.86 3.72,3.86 3.721,3.891 3.723,3.923 3.727,3.954 3.733,3.985 3.74,4.015 3.749,4.045 3.76,4.075 3.772,4.104 3.785,4.132 3.8,4.16 3.817,4.187 3.835,4.213 3.854,4.238 3.874,4.261 3.896,4.284 3.919,4.306 3.942,4.326 3.967,4.345 3.993,4.363 4.02,4.38 4.048,4.395 4.076,4.408 4.105,4.42 4.135,4.431 4.165,4.44 4.195,4.447 4.226,4.453 4.257,4.457 4.289,4.459 4.32,4.46
  Bottom Layer region: -4.289,4.459 -4.257,4.457 -4.226,4.453 -4.195,4.447 -4.165,4.44 -4.135,4.431 -4.105,4.42 -4.076,4.408 -4.048,4.395 -4.02,4.38 -3.993,4.363 -3.967,4.345 -3.942,4.326 -3.919,4.306 -3.896,4.284 -3.874,4.261 -3.854,4.238 -3.835,4.213 -3.817,4.187 -3.8,4.16 -3.785,4.132 -3.772,4.104 -3.76,4.075 -3.749,4.045 -3.74,4.015 -3.733,3.985 -3.727,3.954 -3.723,3.923 -3.721,3.891 -3.72,3.86 -3.72,2.86 -3.721,2.829 -3.723,2.797 -3.727,2.766 -3.733,2.735 -3.74,2.705 -3.749,2.675 -3.76,2.645 -3.772,2.616 -3.785,2.588 -3.8,2.56 -3.817,2.533 -3.835,2.507 -3.854,2.482 -3.874,2.459 -3.896,2.436 -3.919,2.414 -3.942,2.394 -3.967,2.375 -3.993,2.357 -4.02,2.34 -4.048,2.325 -4.076,2.312 -4.105,2.3 -4.135,2.289 -4.165,2.28 -4.195,2.273 -4.226,2.267 -4.257,2.263 -4.289,2.261 -4.32,2.26 -4.355,2.26 -4.385,2.261 -4.415,2.264 -4.445,2.268 -4.474,2.274 -4.504,2.282 -4.532,2.291 -4.561,2.301 -4.588,2.313 -4.615,2.327 -4.641,2.342 -4.667,2.358 -4.691,2.375 -4.715,2.394 -4.738,2.414 -4.759,2.435 -4.779,2.457 -4.799,2.481 -4.816,2.505 -4.833,2.53 -4.848,2.556 -4.862,2.583 -4.875,2.61 -4.886,2.638 -4.895,2.667 -4.903,2.696 -4.91,2.725 -4.915,2.755 -4.918,2.785 -4.92,2.81 -4.92,3.81 -4.92,3.846 -4.919,3.879 -4.916,3.911 -4.911,3.944 -4.904,3.976 -4.896,4.007 -4.886,4.039 -4.875,4.069 -4.862,4.099 -4.847,4.129 -4.831,4.157 -4.814,4.185 -4.795,4.211 -4.774,4.237 -4.752,4.262 -4.73,4.285 -4.705,4.307 -4.68,4.328 -4.654,4.347 -4.626,4.365 -4.598,4.382 -4.569,4.397 -4.539,4.411 -4.509,4.423 -4.478,4.433 -4.446,4.442 -4.414,4.449 -4.382,4.454 -4.35,4.458 -4.32,4.46
  Keep-Out Layer region: 3.5,-3.77 -3.5,-3.77 -3.5,1.88 3.5,1.88
  silkscreen extent -4.47,-3.77 4.47,5.18
PCI [mm]
  rect 0.91x6.22 smd: A1(0,0) A2(-1.27,0) A3(-2.54,0) A4(-3.81,0) A5(-5.08,0) A6(-6.35,0) A7(-7.62,0) A8(-8.89,0) A9(-10.16,0) A10(-11.43,0) A11(-12.7,0) A14(-16.51,0) A15(-17.78,0) A16(-19.05,0) A17(-20.32,0) A18(-21.59,0) A19(-22.86,0) A20(-24.13,0) A21(-25.4,0) A22(-26.67,0) A23(-27.94,0) A24(-29.21,0) A25(-30.48,0) A26(-31.75,0) A27(-33.02,0) A28(-34.29,0) A29(-35.56,0) A30(-36.83,0) A31(-38.1,0) A32(-39.37,0) A33(-40.64,0) A34(-41.91,0) A35(-43.18,0) A36(-44.45,0) A37(-45.72,0) A38(-46.99,0) A39(-48.26,0) A40(-49.53,0) A41(-50.8,0) A42(-52.07,0) A43(-53.34,0) A44(-54.61,0) A45(-55.88,0) A46(-57.15,0) A47(-58.42,0) A48(-59.69,0) A49(-60.96,0) A52(-64.77,0) A53(-66.04,0) A54(-67.31,0) A55(-68.58,0) A56(-69.85,0) A57(-71.12,0) A58(-72.39,0) A59(-73.66,0) A60(-74.93,0) A61(-76.2,0) A62(-77.47,0)
  rect 0.91x6.22 smd far side: B1(0,0) B2(-1.27,0) B3(-2.54,0) B4(-3.81,0) B5(-5.08,0) B6(-6.35,0) B7(-7.62,0) B8(-8.89,0) B9(-10.16,0) B10(-11.43,0) B11(-12.7,0) B14(-16.51,0) B15(-17.78,0) B16(-19.05,0) B17(-20.32,0) B18(-21.59,0) B19(-22.86,0) B20(-24.13,0) B21(-25.4,0) B22(-26.67,0) B23(-27.94,0) B24(-29.21,0) B25(-30.48,0) B26(-31.75,0) B27(-33.02,0) B28(-34.29,0) B29(-35.56,0) B30(-36.83,0) B31(-38.1,0) B32(-39.37,0) B33(-40.64,0) B34(-41.91,0) B35(-43.18,0) B36(-44.45,0) B37(-45.72,0) B38(-46.99,0) B39(-48.26,0) B40(-49.53,0) B41(-50.8,0) B42(-52.07,0) B43(-53.34,0) B44(-54.61,0) B45(-55.88,0) B46(-57.15,0) B47(-58.42,0) B48(-59.69,0) B49(-60.96,0) B52(-64.77,0) B53(-66.04,0) B54(-67.31,0) B55(-68.58,0) B56(-69.85,0) B57(-71.12,0) B58(-72.39,0) B59(-73.66,0) B60(-74.93,0) B61(-76.2,0) B62(-77.47,0)
PLS-2 [mm]
  round 1.6 hole 1.1: 1(0,-1.27) 2(0,1.27)
  silkscreen extent -1.5,-2.7 1.5,2.8, body extent -1.29,-2.52 1.25,2.56, height 8.54
PLS-3 [mm]
  round 1.6 hole 1.1: 1(0,-2.54) 2(0,0) 3(0,2.54)
  silkscreen extent -1.5,-4 1.4,4, body extent -1.29,-3.79 1.25,3.83, height 8.54
R0603 [mm]
  rect 0.85x0.95 smd: 1(-0.675,0) 2(0.675,0)
  silkscreen extent -1.25,-0.63 1.25,0.63, body extent -0.8,-0.4 0.8,0.4, height 0.45
RaPi_PLD-40 [mm]
  round 1.6 hole 1.02 mask+0.05: 1(-1.27,24.13) 2(1.27,24.13) 2(1.27,24.13) 3(-1.27,21.59) 4(1.27,21.59) 5(-1.27,19.05) 6(1.27,19.05) 7(-1.27,16.51) 8(1.27,16.51) 9(-1.27,13.97) 10(1.27,13.97) 11(-1.27,11.43) 12(1.27,11.43) 13(-1.27,8.89) 14(1.27,8.89) 15(-1.27,6.35) 16(1.27,6.35) 17(-1.27,3.81) 18(1.27,3.81) 19(-1.27,1.27) 20(1.27,1.27) 21(-1.27,-1.27) 22(1.27,-1.27) 23(-1.27,-3.81) 24(1.27,-3.81) 25(-1.27,-6.35) 26(1.27,-6.35) 27(-1.27,-8.89) 28(1.27,-8.89) 29(-1.27,-11.43) 30(1.27,-11.43) 31(-1.27,-13.97) 32(1.27,-13.97) 33(-1.27,-16.51) 34(1.27,-16.51) 35(-1.27,-19.05) 36(1.27,-19.05) 37(-1.27,-21.59) 38(1.27,-21.59) 39(-1.27,-24.13) 40(1.27,-24.13)
  rect 1.6x1.6 hole 1.02 mask+0.05: 1(-1.27,24.13)
  silkscreen extent -2.7,-25.65 2.8,25.65, body extent -2.54,-25.4 2.54,25.4, height 9.2
SAMTEC_USB-B-S-X-X-TH [mm]
  rect 1.408x1.408 hole 0.9: 1(1.25,4.7)
  round 1.408 hole 0.9: 2(-1.25,4.7) 3(-1.25,2.7) 4(1.25,2.7)
  round 3.316 hole 2.3: S1(-6.02,0) S2(6.02,0)
  silkscreen extent -6.05,-10.4 6.85,5.8
SMC [mm] "DO-214-AB/SMC; 2 C-Bend Leads; Body 7.9 x 5.9 mm, inc. leads (LxW)"
  rect 2.4x3.3 smd: 1(-3.475,0) 2(3.475,0)
  silkscreen extent -5.07,-2.05 5.43,2.05
SOT-223 [mm]
  rect 2.15x1 smd: 1(-2.925,2.3) 2(-2.925,0) 3(-2.925,-2.3)
  rect 2.15x3.25 smd: 4(2.925,0)
  silkscreen extent -3.05,-3.35 1.55,3.47, body extent -3.5,-3.25 3.5,3.25, height 1.64
SSOP-28_N [mm] "SOP, 28-Leads, Body 10.2x5.3mm, Pitch 0.65mm, IPC Medium Density"
  oval 2.1x0.35 smd: 1(-3.45,4.225) 2(-3.45,3.575) 3(-3.45,2.925) 4(-3.45,2.275) 5(-3.45,1.625) 6(-3.45,0.975) 7(-3.45,0.325) 8(-3.45,-0.325) 9(-3.45,-0.975) 10(-3.45,-1.625) 11(-3.45,-2.275) 12(-3.45,-2.925) 13(-3.45,-3.575) 14(-3.45,-4.225) 15(3.45,-4.225) 16(3.45,-3.575) 17(3.45,-2.925) 18(3.45,-2.275) 19(3.45,-1.625) 20(3.45,-0.975) 21(3.45,-0.325) 22(3.45,0.325) 23(3.45,0.975) 24(3.45,1.625) 25(3.45,2.275) 26(3.45,2.925) 27(3.45,3.575) 28(3.45,4.225)
  silkscreen extent -3.57,-5.25 2,5.25, body extent -2.8,-5.25 2.8,5.25, height 2
STM32-NUCLEO-144-ZIO [mm]
  rect 1.6x1.6 hole 1: CN7_1(53.34,0) CN8_1(7.62,-10.16) CN9_1(7.62,-33.02) CN10_1(53.34,-27.94)
  round 1.6 hole 1: CN7_2(55.88,0) CN7_3(53.34,-2.54) CN7_4(55.88,-2.54) CN7_5(53.34,-5.08) CN7_6(55.88,-5.08) CN7_7(53.34,-7.62) CN7_8(55.88,-7.62) CN7_9(53.34,-10.16) CN7_10(55.88,-10.16) CN7_11(53.34,-12.7) CN7_12(55.88,-12.7) CN7_13(53.34,-15.24) CN7_14(55.88,-15.24) CN7_15(53.34,-17.78) CN7_16(55.88,-17.78) CN7_17(53.34,-20.32) CN7_18(55.88,-20.32) CN7_19(53.34,-22.86) CN7_20(55.88,-22.86) CN8_2(10.16,-10.16) CN8_3(7.62,-12.7) CN8_4(10.16,-12.7) CN8_5(7.62,-15.24) CN8_6(10.16,-15.24) CN8_7(7.62,-17.78) CN8_8(10.16,-17.78) CN8_9(7.62,-20.32) CN8_10(10.16,-20.32) CN8_11(7.62,-22.86) CN8_12(10.16,-22.86) CN8_13(7.62,-25.4) CN8_14(10.16,-25.4) CN8_15(7.62,-27.94) CN8_16(10.16,-27.94) CN9_2(10.16,-33.02) CN9_3(7.62,-35.56) CN9_4(10.16,-35.56) CN9_5(7.62,-38.1) CN9_6(10.16,-38.1) CN9_7(7.62,-40.64) CN9_8(10.16,-40.64) CN9_9(7.62,-43.18) CN9_10(10.16,-43.18) CN9_11(7.62,-45.72) CN9_12(10.16,-45.72) CN9_13(7.62,-48.26) CN9_14(10.16,-48.26) CN9_15(7.62,-50.8) CN9_16(10.16,-50.8) CN9_17(7.62,-53.34) CN9_18(10.16,-53.34) CN9_19(7.62,-55.88) CN9_20(10.16,-55.88) CN9_21(7.62,-58.42) CN9_22(10.16,-58.42) CN9_23(7.62,-60.96) CN9_24(10.16,-60.96) CN9_25(7.62,-63.5) CN9_26(10.16,-63.5) CN9_27(7.62,-66.04) CN9_28(10.16,-66.04) CN9_29(7.62,-68.58) CN9_30(10.16,-68.58) CN10_2(55.88,-27.94) CN10_3(53.34,-30.48) CN10_4(55.88,-30.48) CN10_5(53.34,-33.02) CN10_6(55.88,-33.02) CN10_7(53.34,-35.56) CN10_8(55.88,-35.56) CN10_9(53.34,-38.1) CN10_10(55.88,-38.1) CN10_11(53.34,-40.64) CN10_12(55.88,-40.64) CN10_13(53.34,-43.18) CN10_14(55.88,-43.18) CN10_15(53.34,-45.72) CN10_16(55.88,-45.72) CN10_17(53.34,-48.26) CN10_18(55.88,-48.26) CN10_19(53.34,-50.8) CN10_20(55.88,-50.8) CN10_21(53.34,-53.34) CN10_22(55.88,-53.34) CN10_23(53.34,-55.88) CN10_24(55.88,-55.88) CN10_25(53.34,-58.42) CN10_26(55.88,-58.42) CN10_27(53.34,-60.96) CN10_28(55.88,-60.96) CN10_29(53.34,-63.5) CN10_30(55.88,-63.5) CN10_31(53.34,-66.04) CN10_32(55.88,-66.04) CN10_33(53.34,-68.58) CN10_34(55.88,-68.58)
  silkscreen extent -3.25,-106 66.75,32.74
switch [mm]
  rect 1x1.8 hole 0.7 square mask+0.05: 0(-4.25,0) 0(4.25,0)
  round 1.2 hole 0.8 mask+0.05: 1(-2,0) 2(0,0) 3(2,0)
  silkscreen extent -5.25,-3.15 5.25,3.1, body extent -4.35,-2.25 4.35,2.25, height 7.33
URB_LD-20WR3 [mm]
  round 3 hole 1.5: 1(-10.16,10.16) 2(-10.16,2.54) 3(-10.16,-2.54) 4(10.16,-10.16) 5(10.16,0) 6(10.16,10.16)
  silkscreen extent -25.95,-13.35 25.95,13.35